# Altium PCB PCB4.PcbDoc (part 7 of 7)
Units mm, origin at the board's own origin, x right, y up, seen from the top; angles counter-clockwise.
Board outline 234.9 x 198.3 mm, 4 copper layers (Top Layer, Signal Layer 2, Mid, Bottom Layer), stack 3.052 mm thick; 410 components, 320 nets, 2032 pads, 297 vias.
Unrouted connection lines stored in the file: 1.
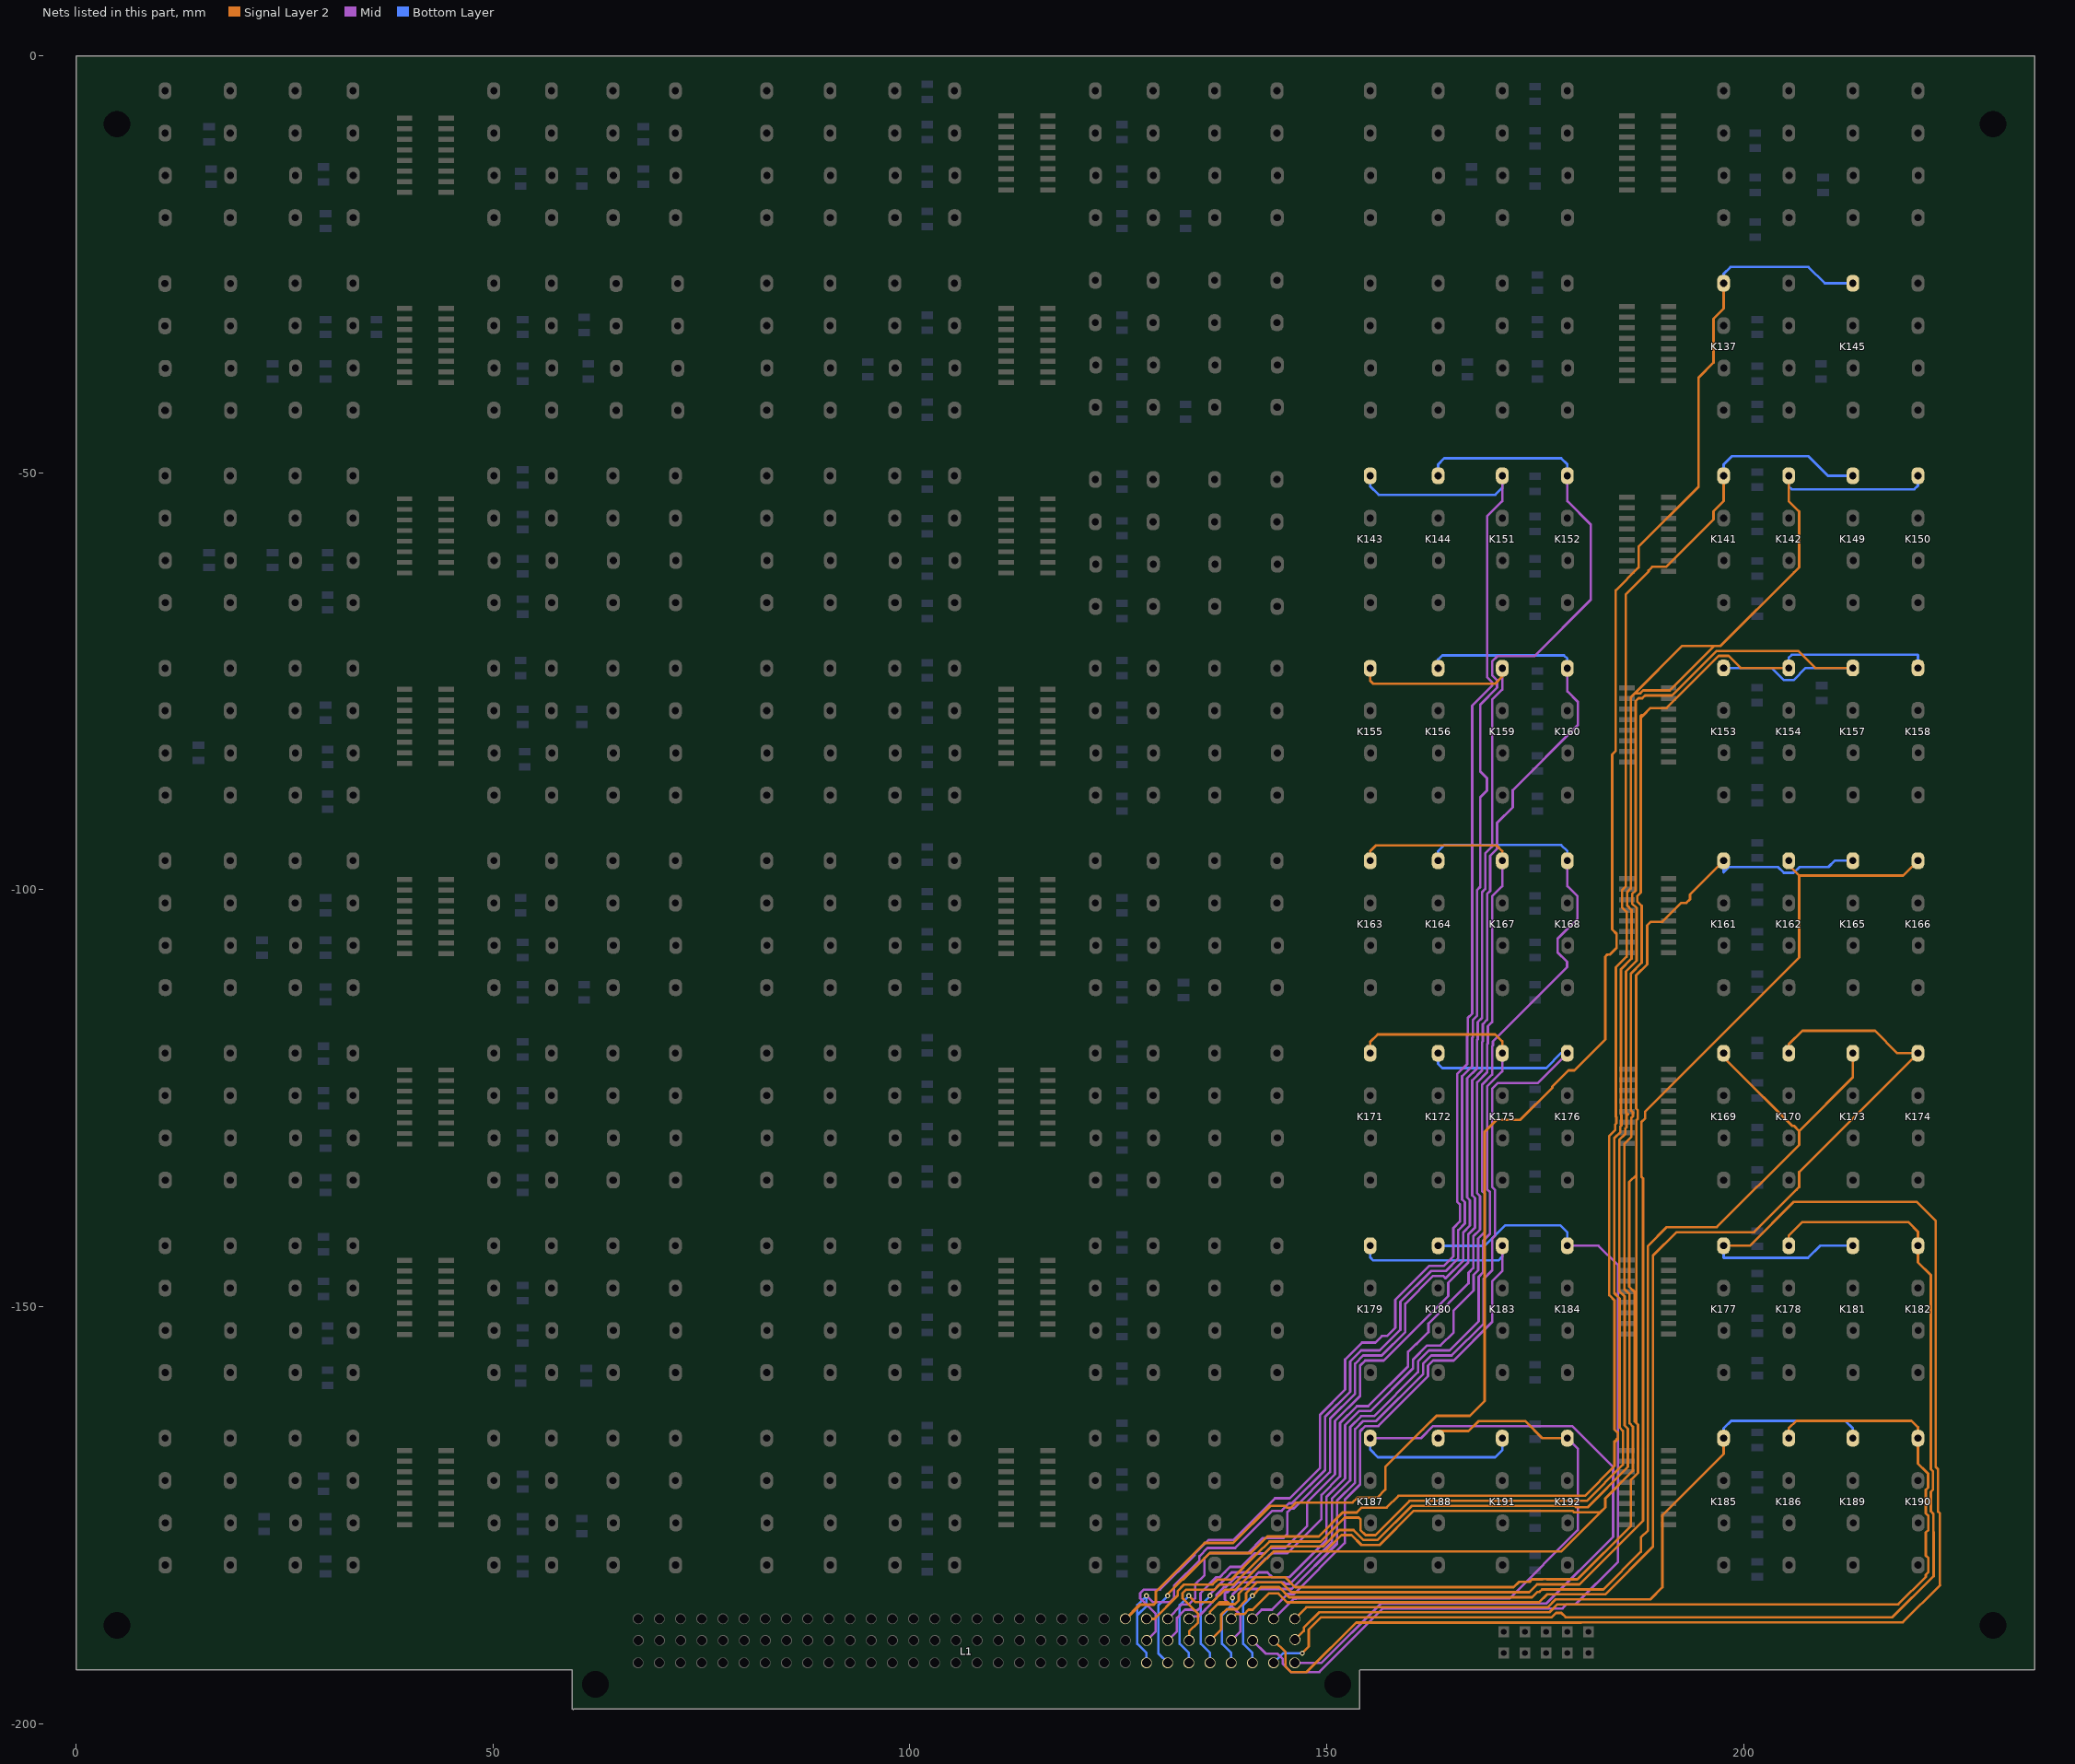
[diagram p9: the nets of this part, all layers, seen from the top]

## Via types
v1: diameter 0.6, hole 0.3, Top Layer to Bottom Layer, 292 vias
v2: diameter 0.7, hole 0.3, Top Layer to Bottom Layer, 5 vias

## Nets (pads, with @x,y where several pads share a name; then routed paths per layer and width w, separated by ;. In a path a pad name is that pad's centre, name@x,y a point inside that pad or via, vN(x,y) a via of type N, cw(c..) or ccw(c..) an arc to the next point about the centre after c; other vN are vias at no path point) (continued)
Y142: K137.7 K145.7 L1.72 | length 225.3
  Signal Layer 2 w0.3: K137.7@197.567,-27.276 197.567,-30.315 196.355,-31.527 196.355,-36.797 194.562,-38.59 194.562,-51.676 187.379,-58.858 187.379,-61.353 184.634,-64.099 184.634,-83.346 184.208,-83.772 184.208,-104.746 184.736,-105.274 184.736,-106.968 184.072,-107.632 183.945,-107.759 183.63,-107.759 183.386,-108.003 183.386,-117.926 179.675,-121.637 178.975,-121.637 177.023,-123.589 177.023,-123.743 173.184,-127.582 170.34,-127.582 168.908,-129.015 168.908,-161.272 167.13,-163.05 163.141,-163.05 161.527,-164.665 161.527,-164.676 157.003,-169.199 157.003,-171.9 156.031,-172.872 153.675,-172.872 153.083,-173.464 146.302,-173.464 145.702,-174.064 145.204,-174.064 144.992,-173.853 143.206,-173.853 138.751,-178.308 135.324,-178.308 129.499,-184.132 129.499,-185.441 129.24,-185.7 127.661,-185.7 ; 127.661,-185.7 125.961,-187.401 L1.72@125.826,-187.401 127.526,-185.7 127.661,-185.7
  Bottom Layer w0.3: K137.7@197.567,-27.276 197.567,-26.144 198.38,-25.332 207.744,-25.332 209.7,-27.287 213.063,-27.287 K145.7@213.063,-27.276
Y144: K144.7 K152.7 L1.73 | length 199.9
  Mid w0.3: v1(128.366,-184.64) 129.116,-185.391 131.216,-185.391 131.656,-184.951 131.656,-183.451 134.719,-180.388 134.719,-179.88 135.691,-178.908 139.009,-178.908 143.464,-174.453 144.552,-174.453 145.448,-173.556 145.788,-173.556 149.779,-169.565 149.779,-163.173 152.779,-160.173 152.779,-156.553 154.103,-155.23 156.327,-155.23 158.803,-152.754 158.803,-149.39 162.499,-145.695 164.252,-145.695 165.751,-144.196 165.751,-140.806 166.552,-140.006 166.552,-137.461 166.213,-137.123 166.213,-122.347 167.413,-121.147 167.413,-117.764 167.498,-117.679 167.498,-115.612 168.013,-115.096 168.013,-100.014 168.388,-99.64 168.388,-88.9 169.184,-88.104 169.184,-86.613 168.388,-85.817 168.388,-77.793 170.413,-75.768 170.413,-74.861 169.813,-74.261 169.813,-72.602 170.434,-71.982 174.886,-71.982 181.646,-65.223 181.646,-56.203 178.835,-53.393 K152.7@178.835,-50.354
  Bottom Layer w0.3: L1.73@128.366,-192.681 128.366,-191.516 127.265,-190.416 127.265,-186.945 ; K144.7@163.339,-50.354 163.339,-49.004 164.075,-48.268 178.098,-48.268 178.835,-49.004 K152.7@178.835,-50.354 ; 127.265,-186.945 128.366,-185.845 v1(128.366,-184.64) 127.265,-185.741 127.265,-186.945
Y146: K143.7 K151.7 L1.74 | length 185.2
  Mid w0.3: L1.74@128.396,-189.99 129.466,-188.92 129.466,-186.801 127.616,-184.951 127.616,-184.33 128.055,-183.89 130.007,-183.89 134.119,-179.779 134.119,-179.631 135.797,-177.952 138.771,-177.952 143.767,-172.956 145.54,-172.956 149.18,-169.317 149.18,-162.925 152.179,-159.925 152.179,-156.305 154.21,-154.275 155.823,-154.275 156.607,-153.49 157.218,-153.49 158.203,-152.505 158.203,-149.142 162.25,-145.095 164.003,-145.095 165.151,-143.947 165.151,-140.558 165.952,-139.757 165.952,-137.71 165.613,-137.371 165.613,-122.098 166.813,-120.898 166.813,-117.515 166.898,-117.431 166.898,-115.363 167.413,-114.848 167.413,-77.919 169.813,-75.519 169.813,-75.109 169.213,-74.509 169.213,-55.205 171.025,-53.393 K151.7@171.025,-50.354
  Bottom Layer w0.3: K143.7@155.191,-50.354 155.191,-51.621 156.208,-52.637 170.178,-52.637 171.025,-51.789 K151.7@171.025,-50.354
Y148: K142.7 K150.7 L1.75 | length 234.7
  Signal Layer 2 w0.3: L1.75@128.366,-187.401 129.318,-187.401 132.096,-184.623 132.096,-184.081 132.886,-183.29 136.269,-183.29 136.869,-182.69 137.925,-182.69 138.561,-182.69 141.604,-179.648 141.604,-179.631 143.106,-178.128 149.267,-178.128 152.131,-175.264 153.828,-175.264 154.02,-175.456 154.02,-176.732 154.64,-177.352 155.823,-177.352 159.923,-173.253 181.18,-173.253 185.498,-168.935 185.498,-164.864 185.094,-164.46 185.094,-148.98 184.462,-148.348 184.462,-129.756 185.183,-129.035 185.183,-128.378 185.316,-128.246 185.316,-127.003 185.256,-126.943 185.256,-109.527 186.536,-108.247 186.536,-102.41 186.008,-101.882 186.008,-100.267 186.434,-99.84 186.434,-76.944 186.942,-76.436 ; K142.7@205.377,-50.354 205.377,-53.393 206.589,-54.605 ; 186.942,-76.436 187.572,-76.436 187.906,-76.102 191.133,-76.102 196.479,-70.756 ; 186.942,-76.436 192.622,-70.756 196.479,-70.756 ; 196.479,-70.756 196.686,-70.756 197.216,-70.756 206.008,-61.964 206.629,-61.343 206.629,-59.685 ; 206.589,-54.605 206.589,-59.645 206.629,-59.685 ; 206.589,-54.605 206.629,-54.645 206.629,-59.685
  Bottom Layer w0.3: K142.7@205.377,-50.354 205.377,-51.616 205.738,-51.976 220.441,-51.976 220.873,-51.544 K150.7@220.873,-50.354
Y150: K141.7 K149.7 L1.76 | length 214.5
  Signal Layer 2 w0.3: v1(130.906,-184.64) 130.906,-184.423 132.638,-182.69 132.756,-182.69 135.939,-179.508 140.879,-179.508 142.858,-177.528 149.019,-177.528 151.883,-174.664 153.58,-174.664 154.172,-174.072 157.149,-174.072 158.569,-172.653 180.932,-172.653 184.494,-169.091 184.494,-166.249 ; K141.7@197.567,-50.354 197.567,-52.724 197.567,-53.393 196.355,-54.605 196.355,-55.593 190.676,-61.272 189.018,-61.272 188.579,-61.711 188.579,-61.85 185.834,-64.596 185.834,-99.592 185.408,-100.018 185.408,-102.131 185.936,-102.659 185.936,-107.998 184.656,-109.278 184.656,-127.192 184.716,-127.252 184.716,-127.997 184.583,-128.13 184.583,-128.786 183.862,-129.508 183.862,-148.596 184.494,-149.228 184.494,-164.709 184.898,-165.113 184.898,-165.734 ; 184.494,-166.249 184.898,-165.844 184.898,-165.734 ; 184.494,-166.249 184.494,-166.138 184.898,-165.734
  Bottom Layer w0.3: L1.76@130.906,-192.681 129.805,-191.58 129.805,-190.416 129.805,-186.945 129.805,-185.741 v1(130.906,-184.64) ; K141.7@197.567,-50.354 197.567,-49.004 198.558,-48.014 207.744,-48.014 210.081,-50.351 213.063,-50.351 K149.7@213.063,-50.354
Y152: K156.7 K160.7 L1.77 | length 160.9
  Mid w0.3: L1.77@130.936,-189.99 132.006,-188.92 132.006,-187.285 132.99,-186.3 133.901,-186.3 133.986,-186.385 134.483,-186.385 134.835,-186.034 134.835,-184.312 136.734,-182.413 137.162,-182.413 137.783,-181.792 137.783,-181.777 138.383,-181.176 139.692,-181.176 141.308,-179.56 142.523,-179.56 143.176,-178.908 145.009,-178.908 147.622,-176.295 147.622,-173.42 150.979,-170.062 150.979,-163.671 153.979,-160.671 153.979,-157.05 154.6,-156.43 156.824,-156.43 164.551,-148.703 164.551,-147.093 166.951,-144.693 166.951,-141.304 167.752,-140.503 167.752,-136.964 167.413,-136.626 167.413,-122.844 168.613,-121.644 168.613,-118.261 168.698,-118.176 168.698,-116.109 169.213,-115.593 169.213,-100.512 169.588,-100.137 169.588,-95.905 170.413,-95.08 170.413,-91.966 172.277,-90.102 172.277,-88.053 180.096,-80.235 180.096,-77.464 178.835,-76.204 K160.7@178.835,-73.432
  Bottom Layer w0.3: K156.7@163.339,-73.432 163.339,-72.379 163.828,-71.89 178.433,-71.89 178.835,-72.292 K160.7@178.835,-73.432
Y154: K155.7 K159.7 L1.78 | length 157.1
  Mid w0.3: L1.78@130.906,-187.401 132.646,-185.66 133.486,-185.66 134.196,-184.951 134.196,-183.284 135.319,-182.161 135.319,-180.128 135.939,-179.508 140.513,-179.508 142.308,-177.712 144.777,-177.712 145.267,-177.222 145.267,-174.585 145.696,-174.156 146.037,-174.156 150.379,-169.814 150.379,-163.422 153.379,-160.422 153.379,-156.802 154.352,-155.83 156.576,-155.83 159.403,-153.002 159.403,-149.639 162.747,-146.295 163.93,-146.295 164.215,-146.58 166.351,-144.444 166.351,-141.055 167.152,-140.254 167.152,-137.213 166.813,-136.874 166.813,-122.595 168.013,-121.395 168.013,-118.012 168.098,-117.928 168.098,-115.86 168.613,-115.345 168.613,-100.263 168.988,-99.888 168.988,-95.657 169.813,-94.832 169.813,-77.216 171.025,-76.004 K159.7@171.025,-73.432
  Signal Layer 2 w0.3: K155.7@155.191,-73.432 155.191,-74.912 155.573,-75.293 170.178,-75.293 171.025,-74.446 K159.7@171.025,-73.432
Y156: K154.7 K158.7 L1.79 | length 239.2
  Signal Layer 2 w0.3: v1(133.446,-184.64) 134.196,-185.391 136.296,-185.391 137.796,-183.89 139.058,-183.89 142.804,-180.145 142.804,-180.128 143.603,-179.328 149.764,-179.328 ; K154.7@205.377,-73.406 199.608,-73.406 198.158,-71.956 196.976,-71.956 190.73,-78.203 188.814,-78.203 187.938,-79.079 ; 149.764,-179.328 151.74,-177.352 152.943,-177.352 154.143,-178.552 156.32,-178.552 160.42,-174.453 179.466,-174.453 179.632,-174.619 182.784,-174.619 183.374,-174.029 ; 149.764,-179.328 178.074,-179.328 183.374,-174.029 ; 183.374,-174.029 183.374,-172.974 186.698,-169.65 186.698,-164.367 186.294,-163.963 186.294,-148.483 185.662,-147.851 185.662,-130.468 186.516,-129.614 186.516,-127.343 186.685,-127.173 186.685,-126.676 186.456,-126.446 186.456,-110.024 187.736,-108.744 187.736,-101.913 187.208,-101.385 187.208,-100.764 187.634,-100.337 187.634,-79.382 ; 187.634,-79.382 187.634,-79.16 187.716,-79.079 187.938,-79.079 ; 187.634,-79.382 187.938,-79.079
  Bottom Layer w0.3: L1.79@133.446,-192.681 133.446,-191.516 132.345,-190.416 132.345,-186.945 132.345,-185.741 v1(133.446,-184.64) ; K154.7@205.377,-73.406 205.377,-72.179 205.738,-71.819 220.827,-71.819 220.873,-71.864 K158.7@220.873,-73.406
Y158: K153.7 K157.7 L1.80 | length 208.3
  Signal Layer 2 w0.3: L1.80@133.476,-189.99 133.476,-188.926 134.546,-187.856 134.546,-186.801 132.696,-184.951 132.696,-184.33 133.135,-183.89 136.532,-183.89 137.132,-183.29 138.809,-183.29 142.204,-179.896 142.204,-179.88 143.355,-178.728 149.516,-178.728 151.492,-176.752 153.192,-176.752 154.392,-177.952 156.071,-177.952 160.171,-173.853 179.715,-173.853 179.881,-174.019 181.263,-174.019 186.098,-169.184 186.098,-164.616 185.694,-164.212 185.694,-148.731 185.062,-148.099 185.062,-130.005 185.783,-129.283 185.783,-128.627 185.916,-128.494 185.916,-127.095 ; K157.7@213.063,-73.406 208.55,-73.406 206.499,-71.356 196.727,-71.356 191.381,-76.702 188.155,-76.702 ; 185.856,-126.695 185.856,-109.775 187.136,-108.495 187.136,-102.162 186.608,-101.634 186.608,-100.515 187.034,-100.089 187.034,-77.36 187.358,-77.036 187.821,-77.036 ; 185.856,-126.695 185.916,-126.755 ; 185.856,-126.695 185.916,-126.755 ; 185.916,-127.095 186.085,-126.925 185.916,-126.755 ; 185.916,-127.095 185.916,-126.755 ; 187.821,-77.036 188.155,-76.702 ; 187.821,-77.036 188.155,-76.702
  Bottom Layer w0.3: K153.7@197.567,-73.406 203.336,-73.406 204.786,-74.856 205.968,-74.856 207.418,-73.406 K157.7@213.063,-73.406
Y160: K164.7 K168.7 L1.81 | length 136.9
  Mid w0.3: L1.81@133.446,-187.401 133.736,-187.11 134.607,-187.11 135.435,-186.282 135.435,-186.252 136.736,-184.951 136.736,-184.521 137.644,-183.613 137.856,-183.613 139.044,-182.424 141.238,-182.424 141.816,-181.846 142.863,-181.846 143.429,-182.413 145.495,-182.413 149.95,-177.958 149.95,-172.789 152.179,-170.559 152.179,-164.168 153.855,-162.493 155.211,-162.493 160.327,-157.376 160.327,-156.305 162.002,-154.63 163.615,-154.63 165.191,-153.054 165.191,-150.43 167.59,-148.032 167.59,-146.167 168.151,-145.606 168.151,-141.801 168.952,-141 168.952,-136.467 168.613,-136.128 168.613,-123.341 169.813,-122.141 169.813,-118.758 169.898,-118.673 169.898,-118.163 178.802,-109.259 178.802,-108.638 177.663,-107.499 177.663,-105.84 180.047,-103.456 180.047,-100.76 178.835,-99.548 K168.7@178.835,-96.509
  Bottom Layer w0.3: K164.7@163.339,-96.509 163.339,-95.359 164.075,-94.623 178.098,-94.623 178.835,-95.359 K168.7@178.835,-96.509
Y162: K163.7 K167.7 L1.82 | length 134
  Mid w0.3: v1(135.986,-184.64) 135.986,-184.423 137.396,-183.013 137.41,-183.013 138.383,-182.04 138.383,-182.026 138.584,-181.825 140.99,-181.825 142.654,-180.16 142.771,-180.16 143.424,-179.508 145.258,-179.508 149.35,-175.416 149.35,-172.541 151.579,-170.311 151.579,-163.919 153.606,-161.893 154.962,-161.893 159.727,-157.128 159.727,-155.386 160.677,-154.436 160.763,-154.436 162.167,-153.033 162.167,-151.995 166.99,-147.173 166.99,-145.919 167.551,-145.357 167.551,-141.552 168.352,-140.751 168.352,-136.716 168.013,-136.377 168.013,-123.092 169.213,-121.892 169.213,-118.509 169.298,-118.425 169.298,-116.357 169.813,-115.842 169.813,-100.76 171.025,-99.548 K167.7@171.025,-96.509
  Signal Layer 2 w0.3: K163.7@155.191,-96.509 155.191,-95.359 155.877,-94.674 170.339,-94.674 171.025,-95.359 K167.7@171.025,-96.509
  Bottom Layer w0.3: L1.82@135.986,-192.681 135.986,-191.516 134.885,-190.416 134.885,-186.945 134.885,-185.741 v1(135.986,-184.64)
Y164: K162.7 K166.7 L1.83 | length 162.9
  Signal Layer 2 w0.3: L1.83@136.016,-189.99 137.336,-188.671 137.336,-186.891 137.982,-186.245 139.241,-186.245 140.316,-185.17 140.316,-184.33 141.633,-183.013 144.523,-183.013 145.723,-184.213 174.249,-184.213 175.193,-183.268 180.272,-183.268 187.898,-175.643 187.898,-134.605 187.716,-134.423 187.716,-127.84 188.164,-127.392 188.164,-126.585 206.629,-108.119 206.629,-98.28 ; K162.7@205.377,-96.509 205.377,-97.029 206.629,-98.28 ; K166.7@220.873,-96.509 219.102,-98.28 206.629,-98.28
Y166: K161.7 K165.7 L1.84 | length 198.3
  Signal Layer 2 w0.3: L1.84@135.986,-187.401 135.986,-186.55 ; 176.412,-182.668 180.024,-182.668 180.059,-182.633 ; K161.7@197.567,-96.509 193.534,-100.543 193.534,-101.131 193.094,-101.571 192.506,-101.571 190.247,-103.83 188.841,-103.83 188.401,-104.269 188.401,-108.927 187.081,-110.247 187.081,-126.223 187.285,-126.428 187.285,-127.422 187.116,-127.592 187.116,-134.175 ; 135.986,-186.55 137.145,-185.391 138.117,-185.391 138.371,-185.645 ; 135.986,-186.55 136.891,-185.645 138.371,-185.645 ; 138.371,-185.645 138.992,-185.645 139.432,-185.205 139.432,-184.365 141.384,-182.413 144.984,-182.413 146.184,-183.613 172.395,-183.613 173.041,-182.967 174.294,-182.967 174.593,-182.668 175.883,-182.668 175.918,-182.633 180.059,-182.633 ; 180.059,-182.633 186.456,-176.237 186.456,-170.741 187.298,-169.899 187.298,-164.119 ; 187.116,-134.175 186.262,-135.029 186.262,-147.602 186.894,-148.234 186.894,-163.715 187.298,-164.119 ; 187.116,-134.175 187.116,-163.937 187.298,-164.119
  Bottom Layer w0.3: K161.7@197.567,-96.509 197.567,-97.899 198.202,-97.265 204.091,-97.265 204.786,-97.959 205.968,-97.959 206.663,-97.265 210.132,-97.265 210.894,-96.502 213.063,-96.502 K165.7@213.063,-96.509
Y168: K172.7 K176.7 L1.85 | length 117.7
  Mid w0.3: v1(138.682,-184.894) 138.682,-184.484 139.344,-183.822 145.783,-183.822 151.22,-178.385 151.22,-173.216 153.379,-171.056 153.379,-164.665 154.352,-163.693 155.906,-163.693 161.527,-158.072 161.527,-156.802 162.499,-155.83 164.961,-155.83 168.79,-152.001 168.79,-146.664 169.813,-145.641 169.813,-141.835 170.152,-141.497 170.152,-135.97 169.813,-135.631 169.813,-123.838 170.478,-123.172 175.25,-123.172 K176.7@178.835,-119.587
  Bottom Layer w0.3: L1.85@138.526,-192.681 138.526,-191.516 137.425,-190.416 137.425,-186.945 138.682,-185.689 v1(138.682,-184.894) ; K172.7@163.339,-119.587 163.339,-120.88 163.828,-121.369 176.299,-121.369 178.102,-119.566 178.835,-119.566 K176.7@178.835,-119.587
Y170: K171.7 K175.7 L1.86 | length 111.4
  Mid w0.3: L1.86@138.556,-189.99 139.626,-188.92 139.626,-186.945 137.776,-185.095 137.776,-184.33 137.893,-184.213 138.105,-184.213 139.293,-183.024 144.839,-183.024 145.037,-183.222 145.534,-183.222 150.62,-178.137 150.62,-172.968 152.779,-170.808 152.779,-164.416 154.103,-163.093 155.658,-163.093 160.927,-157.823 160.927,-156.553 162.25,-155.23 164.712,-155.23 168.19,-151.752 168.19,-146.416 168.751,-145.854 168.751,-142.049 169.552,-141.248 169.552,-136.218 169.213,-135.88 169.213,-123.589 171.025,-121.777 K175.7@171.025,-119.587
  Signal Layer 2 w0.3: K171.7@155.191,-119.587 155.191,-118.219 156.08,-117.33 170.178,-117.33 171.025,-118.178 K175.7@171.025,-119.587
Y172: K170.7 K174.7 L1.87 | length 151.2
  Signal Layer 2 w0.3: L1.87@138.526,-187.401 139.082,-186.845 140.066,-186.845 140.61,-186.3 141.097,-186.3 143.04,-184.357 144.171,-184.357 145.226,-185.413 175.449,-185.413 176.393,-184.468 183.39,-184.468 189.098,-178.761 189.098,-143.864 191.917,-141.044 201.221,-141.044 206.319,-135.947 206.629,-135.636 206.629,-133.831 K174.7@220.869,-119.591 ; K170.7@205.377,-119.587 205.377,-118.529 207.008,-116.899 215.72,-116.899 218.412,-119.591 K174.7@220.869,-119.591 ; K174.7@220.873,-119.587 K174.7@220.869,-119.591
Y174: K169.7 K173.7 L1.88 | length 145.8
  Signal Layer 2 w0.3: v1(141.066,-184.64) 142.094,-183.613 144.275,-183.613 145.475,-184.813 174.612,-184.813 175.258,-184.167 175.494,-184.167 175.793,-183.868 183.142,-183.868 187.656,-179.355 187.656,-177.64 188.498,-176.798 188.498,-142.698 190.752,-140.444 196.761,-140.444 206.629,-130.576 206.629,-129.144 206.629,-128.918 ; K169.7@197.567,-119.587 197.58,-119.587 197.58,-120.095 198.854,-121.369 205.782,-128.297 206.008,-128.297 206.629,-128.918 ; K173.7@213.063,-119.587 213.063,-122.484 206.629,-128.918
  Bottom Layer w0.3: L1.88@141.066,-192.681 141.066,-191.516 139.965,-190.416 139.965,-185.741 v1(141.066,-184.64)
Y176: K180.7 K184.7 L1.89 | length 112.3
  Mid w0.3: L1.89@141.096,-189.99 142.686,-191.58 144.061,-191.58 144.706,-192.225 144.706,-192.796 145.69,-193.781 149.099,-193.781 156.716,-186.164 178.261,-186.164 178.757,-185.668 179.818,-185.668 184.91,-180.576 184.91,-145.016 182.558,-142.665 K184.7@178.835,-142.665
  Bottom Layer w0.3: K180.7@163.339,-142.665 163.339,-142.68 168.933,-142.68 171.397,-140.216 177.971,-140.216 178.835,-141.079 K184.7@178.835,-142.665
Y178: K179.7 K183.7 L1.90 | length 79.5
  Mid w0.3: L1.90@141.066,-187.401 142.166,-186.3 143.416,-186.3 145.294,-184.422 146.031,-184.422 152.144,-178.31 152.144,-173.141 153.979,-171.305 153.979,-164.913 154.6,-164.293 156.155,-164.293 162.127,-158.32 162.127,-157.05 162.747,-156.43 165.209,-156.43 169.813,-151.826 169.813,-146.915 171.025,-145.703 K183.7@171.025,-142.665
  Bottom Layer w0.3: K179.7@155.191,-142.665 155.191,-144.051 155.573,-144.432 170.568,-144.432 171.025,-143.975 K183.7@171.025,-142.665
Y180: K178.7 K182.7 L1.91 | length 145.2
  Signal Layer 2 w0.3: v1(147.046,-191.516) 147.826,-190.736 147.826,-188.704 149.318,-187.213 176.959,-187.213 177.487,-186.684 178.108,-186.684 178.636,-187.213 217.811,-187.213 222.712,-182.311 ; K178.7@205.377,-142.665 205.377,-141.466 207.008,-139.835 219.708,-139.835 220.873,-141 K182.7@220.873,-142.665 220.873,-144.658 222.41,-146.194 222.41,-169.469 222.685,-169.745 222.685,-171.9 222.41,-172.176 222.41,-174.509 222.725,-174.825 222.725,-176.98 222.756,-177.011 222.756,-182.311
  Bottom Layer w0.3: L1.91@143.606,-192.681 144.77,-191.516 v1(147.046,-191.516)
Y182: K177.7 K181.7 L1.92 | length 176.8
  Signal Layer 2 w0.3: L1.92@143.636,-189.99 145.045,-191.4 145.045,-193.136 145.69,-193.781 147.575,-193.781 153.498,-187.858 180.517,-187.858 180.563,-187.812 219.076,-187.812 223.518,-183.37 223.483,-183.336 223.483,-174.735 223.285,-174.536 223.285,-169.496 223.01,-169.221 223.01,-139.682 220.724,-137.396 205.992,-137.396 200.723,-142.665 K177.7@197.567,-142.665
  Bottom Layer w0.3: K177.7@197.567,-142.665 197.567,-144.127 207.693,-144.127 209.167,-142.654 213.063,-142.654 K181.7@213.063,-142.665
Y184: K188.7 K192.7 L1.93 | length 70.1
  Mid w0.3: L1.93@143.606,-187.401 145.984,-185.022 146.28,-185.022 146.337,-184.964 171.886,-184.964 180.087,-176.763 180.087,-166.995 K192.7@178.835,-165.742
  Signal Layer 2 w0.3: K188.7@163.339,-165.742 163.339,-164.893 166.985,-164.893 168.166,-163.711 173.81,-163.711 175.842,-165.743 K192.7@178.835,-165.742
Y186: K187.7 K191.7 L1.94 | length 103.9
  Mid w0.3: L1.94@146.146,-192.681 149.351,-192.681 156.467,-185.564 176.314,-185.564 184.31,-177.569 184.31,-169.176 179.426,-164.293 162.747,-164.293 161.297,-165.742 K187.7@155.191,-165.742
  Bottom Layer w0.3: K187.7@155.191,-165.742 155.191,-167.114 156.106,-168.029 170.178,-168.029 171.025,-167.181 K191.7@171.025,-165.742
Y188: K186.7 K190.7 L1.95 | length 115.4
  Signal Layer 2 w0.3: L1.95@146.176,-189.89 147.226,-188.84 147.226,-188.456 149.069,-186.613 176.71,-186.613 177.654,-185.668 218.506,-185.668 218.518,-185.656 221.81,-182.365 221.81,-182.107 222.125,-181.792 222.125,-180.133 221.81,-179.818 221.81,-177.047 222.125,-176.732 222.125,-175.073 221.81,-174.758 221.81,-171.927 222.085,-171.652 222.085,-169.993 221.81,-169.718 220.873,-168.781 K190.7@220.873,-165.742 220.873,-164.422 220.111,-163.66 206.291,-163.66 205.377,-164.574 K186.7@205.377,-165.742
Y190: K185.7 K189.7 L1.96 | length 87.1
  Signal Layer 2 w0.3: L1.96@146.146,-187.401 147.534,-186.013 148.82,-186.013 176.462,-186.013 ; K185.7@197.567,-165.742 197.567,-167.622 190.218,-174.971 190.218,-183.624 188.774,-185.068 179.627,-185.068 177.406,-185.068 ; K189.7@213.063,-166.312 K189.7@213.063,-165.742 ; 176.462,-186.013 177.406,-185.068 ; 176.462,-186.013 177.406,-185.068
  Bottom Layer w0.3: K185.7@197.567,-165.742 197.567,-164.574 198.481,-163.66 212.149,-163.66 213.063,-164.574 K189.7@213.063,-165.742
pads on no net: D0.10 D1.10 D2.10 D3.10 D4.10 D5.10 D6.10 D7.10 D8.10 D9.10 D10.10 D11.10 D12.10 D13.10 D14.10 D15.10 D16.10 D17.10 D18.10 D19.10 D20.10 D21.10 D22.10 D23.10 L1.97 L1.98 PLD1.10

## Silkscreen, mask and mechanical layers (free items; w line width, h text height)
Top Overlay:
  text "31" at 66.996,-186.541 h1
  text "30" at 69.536,-186.541 h1
  text "29" at 72.076,-186.541 h1
  text "28" at 74.616,-186.541 h1
  text "27" at 77.156,-186.541 h1
  text "26" at 79.696,-186.541 h1
  text "25" at 82.236,-186.541 h1
  text "24" at 84.776,-186.541 h1
  text "23" at 87.316,-186.541 h1
  text "22" at 89.856,-186.541 h1
  text "21" at 92.396,-186.541 h1
  text "20" at 94.936,-186.541 h1
  text "19" at 97.476,-186.541 h1
  text "18" at 100.016,-186.541 h1
  text "17" at 102.556,-186.541 h1
  text "16" at 105.096,-186.541 h1
  text "15" at 107.636,-186.541 h1
  text "14" at 110.176,-186.541 h1
  text "13" at 112.716,-186.541 h1
  text "12" at 115.256,-186.541 h1
  text "11" at 117.796,-186.541 h1
  text "10" at 120.336,-186.541 h1
  text "10" at 122.876,-186.541 h1
  text "9" at 125.676,-186.541 h1
  text "8" at 128.176,-186.541 h1
  text "7" at 130.776,-186.541 h1
  text "6" at 133.276,-186.541 h1
  text "5" at 135.876,-186.541 h1
  text "4" at 138.276,-186.541 h1
  text "3" at 140.876,-186.541 h1
  text "2" at 143.376,-186.541 h1
  text "1" at 145.976,-186.541 h1
  text "c" at 65.776,-187.541 h1
  text "c" at 147.476,-187.641 h1
  text "b" at 65.776,-190.241 h1
  text "b" at 147.476,-190.341 h1
  text "a" at 65.776,-192.841 h1
  text "a" at 147.476,-192.941 h1
Mechanical 1:
  lines w0.254: -0.002,-193.531 -0.002,0.017 234.9,0.017 234.9,-193.5
  lines w0.3: 0,-193.5 59.6,-193.5 ; 59.59,-193.628 59.59,-198.2 153.824,-198.2 153.824,-193.628 153.952,-193.5 234.9,-193.5
Mechanical 13:
  lines w0.3: 59.59,-193.51 59.6,-193.5